# Altium PCB Copy of PCB1.PcbDoc
Units mm, origin at the board's own origin, x right, y up, seen from the top; angles counter-clockwise.
Board outline 125 x 95 mm, 2 copper layers (Top Layer, Bottom Layer); 40 components, 22 nets, 95 pads, 0 vias.
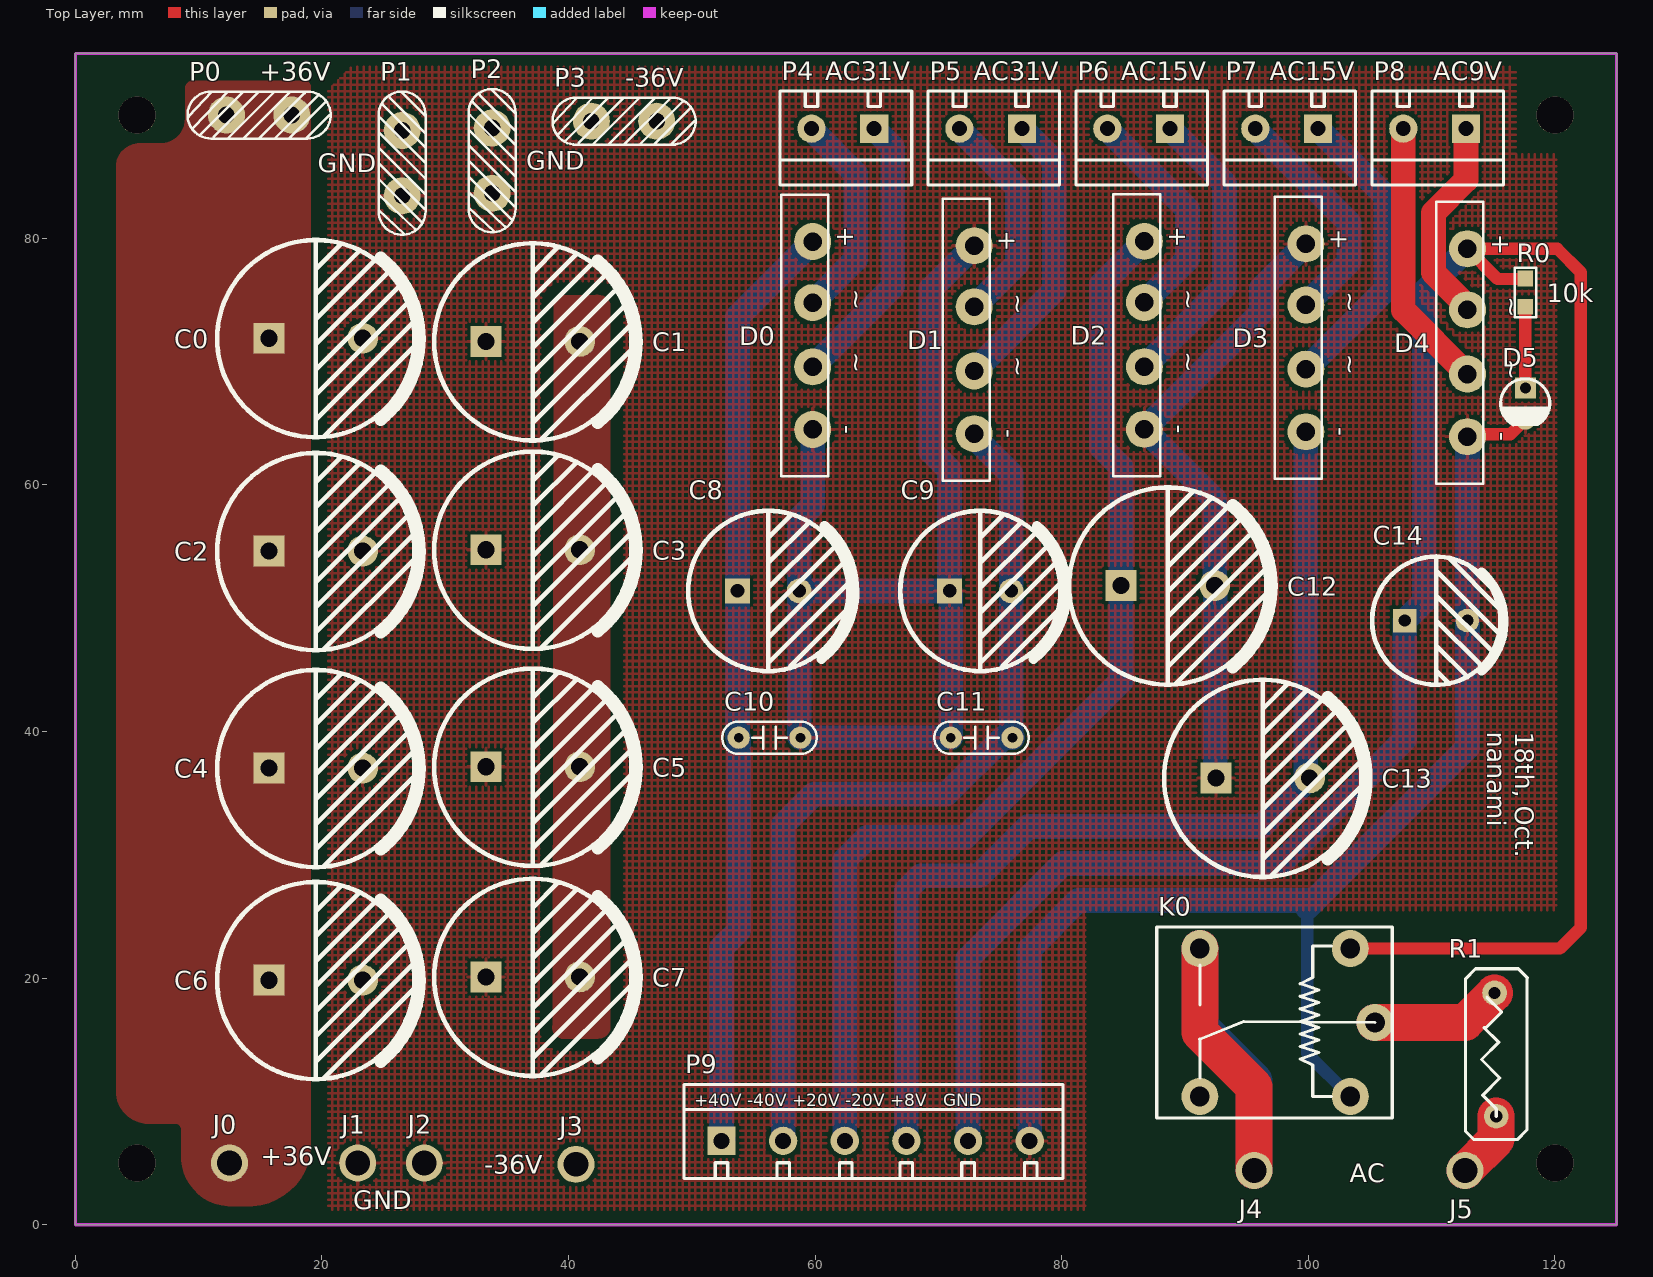
[diagram p0: Top Layer view]
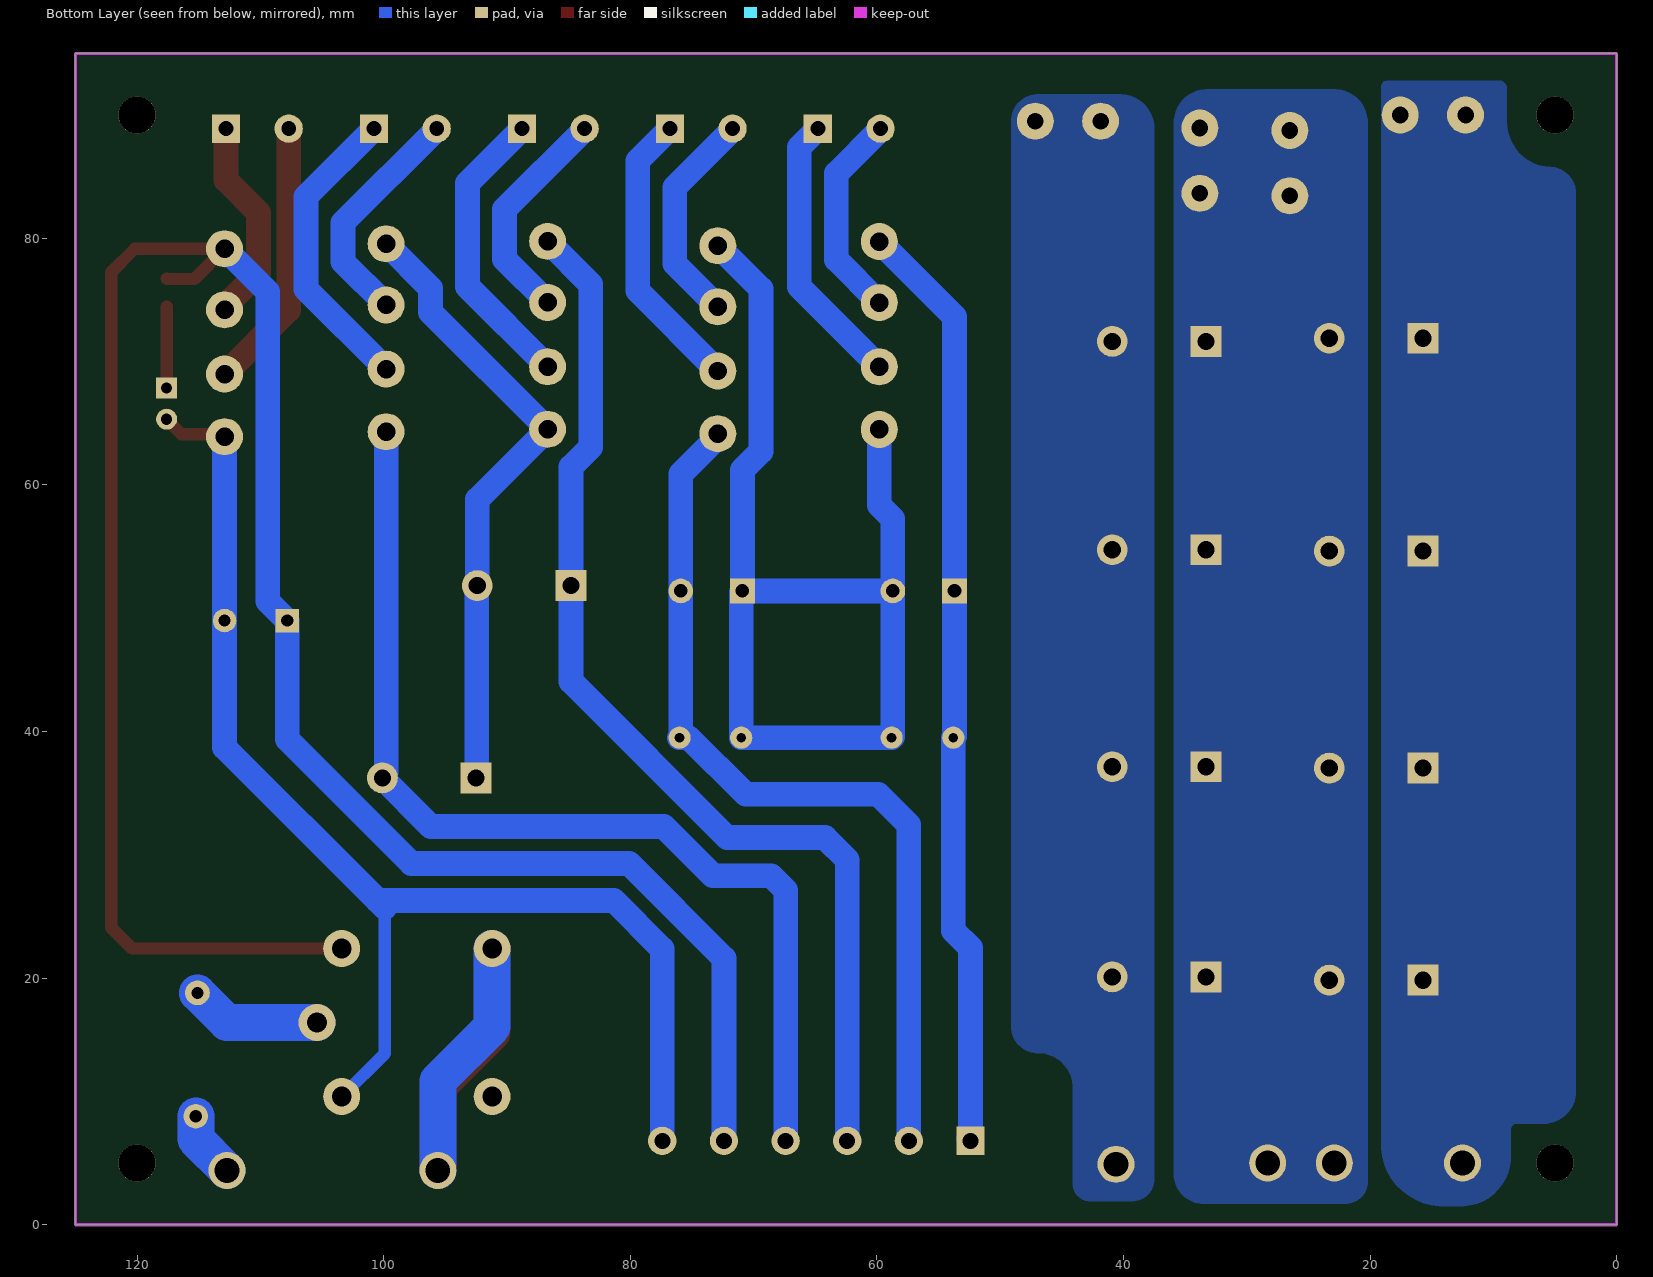
[diagram p1: Bottom Layer view, seen from below]

## Layer stack, top to bottom
Top Solder: solder mask 0.0102, Solder Resist, Dk 3.5
Top Layer: signal copper 0.0356
Dielectric 1: dielectric 0.32, FR-4, Dk 4.8
Bottom Layer: signal copper 0.0356
Bottom Solder: solder mask 0.0102, Solder Resist, Dk 3.5

## Board outline
0,0 0,95 125,95 125,0

## Design rules (kind name [scope] priority, off if disabled: settings)
Clearance Clearance_2 [OnLayer('Top Layer') vs InNamedPolygon('NETC1_2_L01_P005')] p1: gap=1 ignorepadtopadclearanceinfootprint=TRUE
Clearance Clearance_1 [OnLayer('Bottom Layer')] p2: gap=1 ignorepadtopadclearanceinfootprint=TRUE
Clearance [All] p3: gap=0.254 ignorepadtopadclearanceinfootprint=TRUE
PolygonConnect gnd2 [InNet('GND') vs OnBottomLayer] p1: connectstyle=Direct reliefconductorwidth=0.254 reliefentries=4 polygonreliefangle="90 Angle" airgapwidth=0.254
PolygonConnect 1-2 [InNet('NetC1_2')] p2: connectstyle=Direct reliefconductorwidth=0.254 reliefentries=4 polygonreliefangle="90 Angle" airgapwidth=0.254
PolygonConnect 0-1 [InNet('NetC0_1')] p3: connectstyle=Direct reliefconductorwidth=0.254 reliefentries=4 polygonreliefangle="90 Angle" airgapwidth=0.254
PolygonConnect [All] p4: connectstyle=Relief reliefconductorwidth=0.254 reliefentries=4 polygonreliefangle="90 Angle" airgapwidth=0.254
RoutingVias [All] p1: holewidth=0.711 width=1.27 viastyle="Through Hole" minholewidth=0.711 minwidth=1.27 maxholewidth=0.711 maxwidth=1.27
SolderMaskExpansion [All] p1: expansion=0.102 istentingtop=FALSE
Width [All] p1: maxlimit=3 minlimit=1 preferedwidth=2 minimp=50.000000 maximp=50.000000 favimp=50.000000
30 further rules are at their usual default settings.

## Components (designator, comment, footprint, x,y, rotation, side; value= is the part's Value field where it differs from the comment)
C0 "2700uF" "CAP 7.5*16*25 - GD" 19.5,71.862 r0 top
C1 "2700uF" "CAP 7.5*16*25 - GD" 37.1,71.6 r0 top
C2 "2700uF" "CAP 7.5*16*25 - GD" 19.5,54.6 r0 top
C3 "2700uF" "CAP 7.5*16*25 - GD" 37.1,54.7 r0 top
C4 "2700uF" "CAP 7.5*16*25 - GD" 19.5,37 r0 top
C5 "2700uF" "CAP 7.5*16*25 - GD" 37.1,37.1 r0 top
C6 "2700uF" "CAP 7.5*16*25 - GD" 19.5,19.8 r0 top
C7 "2700uF" "CAP 7.5*16*25 - GD" 37.1,20.062 r0 top
C8 "470uF" "CAP 5.0*12.5*25 - BK" 56.2,51.4 r0 top
C9 "470uF" "CAP 5.0*12.5*25 - BK" 73.4,51.4 r0 top
C10 "0.1uF" "CY 5*7*2.5" 56.3,39.5 r0 top
C11 "0.1uF" "CY 5*7*2.5" 73.5,39.5 r0 top
C12 "2200uF" "CAP 7.5*16*25" 88.6,51.8 r0 top
C13 "2200uF" "CAP 7.5*16*25" 96.3,36.2 r0 top
C14 "3300uF" "CAP 5.0*10*20 - BK" 110.36,49 r0 top
D0 "Comment" 整流桥-5-B 59.8,64.5 r90 top
D1 "Comment" 整流桥-5-B 72.9,64.16 r90 top
D2 "Comment" 整流桥-5-B 86.7,64.513 r90 top
D3 "Comment" 整流桥-5-B 99.8,64.313 r90 top
D4 "Comment" 整流桥-5-B 112.9,63.913 r90 top
D5 "Comment" "LED 3MM-B" 117.6,66.6 r270 top
J0 "+36V" 123312 12.5,5 r0 top
J1 "GND" 123312 22.9,5 r0 top
J2 "GND" 123312 28.3,5 r0 top
J3 "-36V" 123312 40.6,4.9 r0 top
J4 "AC" 123312 95.6,4.4 r0 top
J5 "AC" 123312 112.7,4.4 r0 top
K0 "DC12V" SRD-C_BK 103.4,10.4 r180 top
P0 "+36V" DJ6113-6.3x0.8x13 14.9,90 r0 top
P1 "GND" DJ6113-6.3x0.8x13 26.5,86.1 r90 top
P2 "GND" DJ6113-6.3x0.8x13 33.8,86.3 r90 top
P3 "-36V" DJ6113-6.3x0.8x13 44.5,89.5 r0 top
P4 "AC31V" KF301-5.0-2P 59.7,88.9 r180 top
P5 "AC31V" KF301-5.0-2P 71.7,88.9 r180 top
P6 "AC15V" KF301-5.0-2P 83.7,88.9 r180 top
P7 "AC15V" KF301-5.0-2P 95.7,88.9 r180 top
P8 "AC9V" KF301-5.0-2P 107.7,88.9 r180 top
P9 "前级输出" KF301-5.0-6P 64.9,6.8 r0 top
R0 "10k" "R 0805_M" 117.6,75.6 r270 top
R1 "热敏5D-25" NTC-5D-9 115.236,8.8 r90 top

## Footprints (in the part's own frame and the unit in brackets; to place one, negate y for a bottom-side part, rotate by r counter-clockwise, add the part's x,y. Pads: shape width x height; smd on the part's side, far side on the other; paste and mask are expansions set on the pad)
123312 [mm]
  round 3 hole 2: 1(0,0)
"CAP 5.0*10*20 - BK" [mm] "脚距5mm直径10mm高度20mm"
  rect 1.9x1.9 hole 1: 1(-2.54,0)
  round 1.9 hole 1: 2(2.54,0)
  silkscreen extent -5.18,-5.21 5.51,5.19, body extent -5,-5 5.01,5, height 20.04
"CAP 5.0*12.5*25 - BK" [mm] "脚距5mm直径12.5mm高度25mm"
  rect 2x2 hole 1.1: 1(-2.5,0)
  round 2 hole 1.1: 2(2.5,0)
  silkscreen extent -6.5,-6.5 6.99,6.5, body extent -6.25,-6.25 6.26,6.25, height 25.04
"CAP 7.5*16*25" [mm] "脚距7.5mm直径16mm高度25mm"
  rect 2.5x2.5 hole 1.4: 1(-3.8,0.038)
  round 2.5 hole 1.4: 2(3.8,0.038)
  silkscreen extent -8,-8 8.42,8, body extent -8,-8 8.01,8, height 25.03
"CAP 7.5*16*25 - GD" [mm] "脚距7.5mm直径16mm高度25mm"
  rect 2.5x2.5 hole 1.4: 1(-3.8,0.038)
  round 2.5 hole 1.4: 2(3.8,0.038)
  silkscreen extent -8,-8 8.42,8, body extent -8,-8 8.01,8, height 25.04
"CY 5*7*2.5" [mm] "脚距5mm，直径7mm，厚2.5mm"
  round 1.8 hole 0.8: 1(-2.5,0) 2(2.5,0)
  silkscreen extent -3.83,-1.31 3.83,1.31, body extent -3.5,-1.25 3.5,1.25, height 7
DJ6113-6.3x0.8x13 [mm] "宽：6.3mm，厚0.8mm，高：13mm"
  round 3 hole 1.35: 1(-2.65,0) 1(2.65,0)
  silkscreen extent -5.8,-1.91 5.8,1.91, body extent -3.9,-0.4 3.9,0.4, height 9.55
KF301-5.0-2P [mm] "可拼接端子/6A"
  rect 2.3x2.3 hole 1.2: 1(-5.08,0)
  round 2.3 hole 1.2: 2(0,0)
  silkscreen extent -8.13,-3.05 2.54,4.57, body extent -7.95,-3 2.55,4.6, height 10.05
KF301-5.0-6P [mm] "可拼接端子/6A"
  rect 2.3x2.3 hole 1.3: 1(-12.5,0)
  round 2.3 hole 1.3: 2(-7.5,0) 3(-2.5,0) 4(2.5,0) 5(7.5,0) 6(12.5,0)
  silkscreen extent -15.55,-3.05 15.19,4.57, body extent -15.37,-3 15.13,4.6, height 10.05
"LED 3MM-B" [mm] "蓝色3mm直插LED"
  rect 1.7x1.7 hole 0.9: 1(-1.27,0)
  round 1.7 hole 0.9: 2(1.27,0)
  silkscreen extent -2.01,-2 1.72,1.98, body extent -1.95,-1.95 1.64,1.95, height 5.55
NTC-5D-9 [mm]
  round 2 hole 1: 1(0,0) 2(10,0.136)
  silkscreen extent -1.9,-2.51 11.96,2.5, body extent -2.23,-3.57 12.03,4.08, height 2.25
"R 0805_M" [mil] "1/8W贴片电阻"
  rect 50x50 smd: 1(-45.01,-0.01) 2(45,0)
  silkscreen extent -79,-34 79,34, body extent -39,-25 39,25, height 20
SRD-C_BK [mm] "单刀双投"
  round 3 hole 1.6: 1(0,0) 2(0,-12) 3(-2,-6) 4(12.2,0) 5(12.2,-12)
  silkscreen extent -3.4,-13.75 15.7,1.75, body extent -3.4,-13.75 15.7,1.75, height 15.6
整流桥-5-B [mm] "Bridge Rectifier; 4 Terminals; Body 9.4 x 9.4 mm (typ); Pitch 5.08 mm"
  round 3 hole 1.5: 10(0,0) 11(5.08,0) 12(10.287,0) 13(15.24,0)
  silkscreen extent -3.81,-1.27 19.05,2.54, body extent -3.53,-1.22 18.77,2.54, height 20.8

## Part data
C0 C1 C2 C3 C4 C5 C6 C7 C8 C9 C12 C13 C14: library part C-CAP, "直插电解电容", BOM名称=直插电解电容, 学习资源=www.ooocke.com, 版权归属=源创客
C10 C11: library part C-CY, "高压陶瓷电容，Y电容", BOM名称=高压陶瓷电容，Y电容, 学习资源=www.ooocke.com, 版权归属=源创客
D0 D1 D2 D3 D4: library part KBP, "1KV/2A整流桥", BOM名称=1KV/2A整流桥, 学习资源=www.ooocke.com, 版权归属=源创客
D5: library part LED-3MM, "插件LED", BOM名称=插件LED, 学习资源=www.ooocke.com, 版权归属=源创客
J0 J1 J2 J3 J4 J5: library part 1
K0: library part SRD-S-112D, "12V一组转换", BOM名称=12V继电器, 学习资源=www.ooocke.com, 版权归属=源创客
P0 P1 P2 P3: library part 冷压插片, BOM名称=10P接插件, 学习资源=www.ooocke.com, 版权归属=源创客
P4 P5 P6 P7 P8: library part "Header 2", "2P接插件", BOM名称=2P接插件, 学习资源=www.ooocke.com, 版权归属=源创客
P9: library part "Header 6", "6P接插件", BOM名称=6P接插件, 学习资源=www.ooocke.com, 版权归属=源创客
R0: library part R, "贴片电阻", BOM名称=贴片电阻, 学习资源=www.ooocke.com, 版权归属=源创客
R1: library part rv

## Free pads (board coordinates)
  round 3 hole 3: 0(5,5) 0(5,90) 0(120,5) 0(120,90)

## Nets (pads, with @x,y where several pads share a name; then routed paths per layer and width w, separated by ;. In a path a pad name is that pad's centre, name@x,y a point inside that pad or via, vN(x,y) a via of type N, cw(c..) or ccw(c..) an arc to the next point about the centre after c; other vN are vias at no path point)
GND: C0.2 C1.1 C2.2 C3.1 C4.2 C5.1 C6.2 C7.1 C8.2 C9.1 C10.2 C11.1 C12.2 C13.1 C14.2 D0.10 D1.13 D2.10 D3.13 D4.10 D5.2 J1.1 J2.1 K0.1 P1.1 P2.1 P9.6 | length 249
  Top Layer w1: D4.10@113.091,64.104 116.374,64.104 D5.2
  Top Layer w2: D4.10 D4.10@113.091,64.104
  Bottom Layer w1: 99.9,25.7 99.9,13.9 K0.1
  Bottom Layer w2: D0.10 59.8,58.365 58.7,57.265 C8.2 ; D1.13 69.4,75.9 69.4,62.71 70.9,61.21 C9.1 ; P9.6 77.4,22.357 81.343,26.3 100.5,26.3 ; C13.1 92.45,36.288 92.45,51.788 C12.2 92.4,58.813 D2.10 96.2,74.013 96.2,75.953 D3.13 ; 99.9,25.7 100.5,26.3 ; D4.10 C14.2 112.9,38.7 100.5,26.3 ; C8.2 58.7,39.6 C10.2 C11.1 71,51.3 C9.1 ; C8.2 C9.1
NetC0_1: C0.1 C2.1 C4.1 C6.1 J0.1 P0.1
NetC1_2: C1.2 C3.2 C5.2 C7.2 J3.1 P3.1
NetC8_1: C8.1 C10.1 D0.13 P9.1 | length 76.3
  Bottom Layer w2: P9.1@52.55,6.95 P9.1 52.4,22.45 53.8,23.85 C10.1 53.7,39.6 C8.1 53.7,73.64 D0.13
NetC9_2: C9.2 C11.2 D1.10 P9.2 | length 73.1
  Bottom Layer w2: P9.2 57.4,32.428 59.872,34.9 70.643,34.9 75.243,39.5 C11.2 75.9,39.6 C9.2 75.9,60.889 72.9,63.889 D1.10
NetC12_1: C12.1 D2.13 P9.3 | length 89
  Bottom Layer w2: P9.3 62.4,29.6 64.2,31.4 72.143,31.4 84.8,44.057 C12.1 84.8,61.463 83.2,63.063 83.2,76.253 D2.13
NetC13_2: C13.2 D3.10 P9.4 | length 85
  Bottom Layer w2: P9.4 67.4,27.128 68.572,28.3 73.285,28.3 77.285,32.3 96.162,32.3 C13.2 ; D3.10 99.8,36.673 100.1,36.373 C13.2 ; C13.2@100.088,36.238 C13.2
NetC14_1: C14.1 D4.13 K0.2 P9.5 R0.1 | length 187.7
  Top Layer w1: K0.2 120.4,22.4 122.1,24.1 122.1,77.233 120.18,79.153 D4.13 115.353,76.7 117.557,76.7 R0.1
  Bottom Layer w2: P9.5 72.4,21.6 80.1,29.3 97.758,29.3 107.82,39.362 C14.1 109.4,50.58 109.4,75.653 D4.13
NetD0_11: D0.11 P4.1 | length 22.6
  Bottom Layer w2: D0.11 66.3,76.08 66.3,87.38 P4.1
NetD0_12: D0.12 P4.2 | length 17.1
  Bottom Layer w2: P4.2 59.7,88.852 63.3,85.252 63.3,78.287 D0.12
NetD1_11: D1.11 P5.1 | length 23.4
  Bottom Layer w2: D1.11 79.4,75.74 79.4,86.28 P5.1
NetD1_12: D1.12 P5.2 | length 17.8
  Bottom Layer w2: P5.2 71.7,88.852 76.4,84.152 76.4,77.947 D1.12
NetD2_11: D2.11 P6.1 | length 23.8
  Bottom Layer w2: D2.11 93.2,76.093 93.2,84.48 P6.1
NetD2_12: D2.12 P6.2 | length 18.2
  Bottom Layer w2: P6.2 83.7,88.852 90.2,82.352 90.2,78.3 D2.12
NetD3_11: D3.11 P7.1 | length 24.5
  Bottom Layer w2: D3.11 106.3,75.893 106.3,83.38 P7.1
NetD3_12: D3.12 P7.2 | length 18.9
  Bottom Layer w2: P7.2 95.7,88.852 103.3,81.252 103.3,78.1 D3.12
NetD4_11: D4.11 P8.2 | length 22.1
  Top Layer w2: P8.2 107.7,74.193 D4.11
NetD4_12: D4.12 P8.1 | length 16.9
  Top Layer w2: P8.1 112.78,84.698 110.146,82.064 110.146,77.225 112.9,74.471 D4.12
NetD5_1: D5.1 R0.2 | length 6.6
  Top Layer w1: D5.1 R0.2
NetJ4_1: J4.1 K0.5 | length 39.6
  Top Layer w3: K0.5 91.2,15.6 95.6,11.2 J4.1
  Bottom Layer w3: K0.5 91.2,16.057 95.6,11.657 J4.1
NetJ5_1: J5.1 R1.1 | length 11.2
  Top Layer w2: J5.1 J5.1@112.7,4.671
  Top Layer w3: J5.1 115.236,6.936 R1.1
  Bottom Layer w3: J5.1 115.236,6.936 R1.1
NetK0_3: K0.3 R1.2 | length 21.5
  Top Layer w3: K0.3 112.7,16.4 R1.2
  Bottom Layer w2: K0.3 K0.3@105.4,16.5
  Bottom Layer w3: K0.3 112.7,16.4 R1.2
pads on no net: K0.4

## Polygon pours and split planes (outlines as drawn)
GND on Top Layer "GND_L01_P012" (hatched 90Degree grid 0.508 track 0.203, pour order 12): 20.5,92 20.5,1.2 81.9,1.2 81.9,25.5 120.1,25.5 120.1,86.8 116.8,86.8 116.8,93.9 22.4,93.9
NetC0_1 on Top Layer "NETC0_1_L01_P013" (solid, pour order 13): 19.1,6.529 cw(c14.071,6.529) 14.071,1.5 12.6,1.5 cw(c12.6,5.5) 8.6,5.5 8.6,7.7 ccw(c8.1,7.7) 8.1,8.2 5.9,8.2 cw(c5.9,10.8) 3.3,10.8 3.3,85.8 cw(c5.2,85.8) 5.2,87.7 6.9,87.7 ccw(c6.9,89.7) 8.9,89.7 8.9,92.1 cw(c9.55,92.15) 9.5,92.8 18.6,92.8 cw(c18.6,92.3) 19.1,92.3
NetC1_2 on Top Layer "NETC1_2_L01_P005" (solid, pour order 5): 43.4,16.1 cw(c42.4,16.1) 42.4,15.1 39.4,15.1 cw(c39.6,16) 38.7,16.2 38.8,74.6 cw(c39.55,74.65) 39.5,75.4 42.1,75.4 cw(c42.35,74.35) 43.4,74.6
NetC0_1 on Bottom Layer "NETC0_1_L02_P002" (solid, pour order 2): 19.1,6.529 cw(c14.071,6.529) 14.071,1.5 12.6,1.5 cw(c12.6,5.5) 8.6,5.5 8.6,7.7 ccw(c8.1,7.7) 8.1,8.2 5.9,8.2 cw(c5.9,10.8) 3.3,10.8 3.3,83.7 cw(c5.507,83.602) 5.605,85.809 ccw(c5.25,89.45) 8.9,89.7 8.9,92.1 cw(c9.55,92.15) 9.5,92.8 18.6,92.8 cw(c18.6,92.3) 19.1,92.3
NetC1_2 on Bottom Layer "NETC1_2_L02_P016" (solid, pour order 16): 49.1,16.1 cw(c46.9,16.1) 46.9,13.9 ccw(c46.9,11.1) 44.1,11.1 44.1,3.3 cw(c42.7,3.3) 42.7,1.9 39.3,1.9 cw(c39.3,3.7) 37.5,3.7 37.5,88.9 cw(c40.3,88.9) 40.3,91.7 46.9,91.7 cw(c46.9,89.5) 49.1,89.5
GND on Bottom Layer "GND_L02_P015" (solid, pour order 15): 35.9,4.1 cw(c33.5,4.1) 33.5,1.7 22,1.7 cw(c22,3.5) 20.2,3.5 20.2,89.4 cw(c22.9,89.4) 22.9,92.1 33.2,92.1 cw(c33.2,89.4) 35.9,89.4

## Keep-outs
Keep-Out Layer:
  the board outline again, w0.254

## Silkscreen, mask and mechanical layers (free items; w line width, h text height)
Top Overlay:
  text "18th, Oct. / nanami" at 114.5,40 h1.52 r270
  text "+40V -40V +20V -20V +8V   GND" at 50.2,9.6 h1
  text "+36V" at 15.054,4.824 h1.52
  text "-36V" at 33.154,4.154 h1.52
  text "AC" at 103.354,3.454 h1.52
  text "GND" at 22.554,1.254 h1.52

## Text inside footprints (layer, text, board x,y; h text height)
D0: Top Overlay "~" at 63.991,69.072 h1.5 r90; Top Overlay "~" at 63.991,74.152 h1.5 r90; Top Overlay "-" at 63.102,64.119 h1.5 r90; Top Overlay "+" at 63.102,79.232 h1.5 r90
D1: Top Overlay "~" at 77.091,68.732 h1.5 r90; Top Overlay "~" at 77.091,73.812 h1.5 r90; Top Overlay "-" at 76.202,63.779 h1.5 r90; Top Overlay "+" at 76.202,78.892 h1.5 r90
D2: Top Overlay "~" at 90.891,69.085 h1.5 r90; Top Overlay "~" at 90.891,74.165 h1.5 r90; Top Overlay "-" at 90.002,64.132 h1.5 r90; Top Overlay "+" at 90.002,79.245 h1.5 r90
D3: Top Overlay "~" at 103.991,68.885 h1.5 r90; Top Overlay "~" at 103.991,73.965 h1.5 r90; Top Overlay "-" at 103.102,63.932 h1.5 r90; Top Overlay "+" at 103.102,79.045 h1.5 r90
D4: Top Overlay "~" at 117.091,68.485 h1.5 r90; Top Overlay "~" at 117.091,73.565 h1.5 r90; Top Overlay "-" at 116.202,63.532 h1.5 r90; Top Overlay "+" at 116.202,78.645 h1.5 r90